# EAGLE board 20190105_ORIGAMI_V1-H-P (EAGLE 9.2.0)
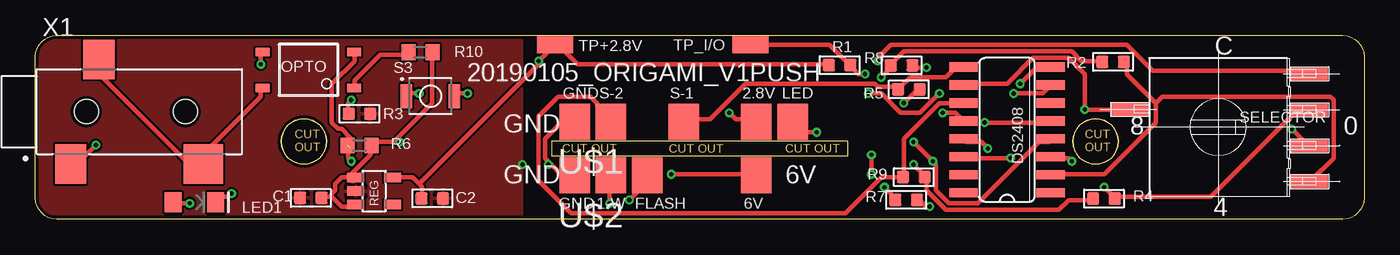
[diagram p0: board, top side]
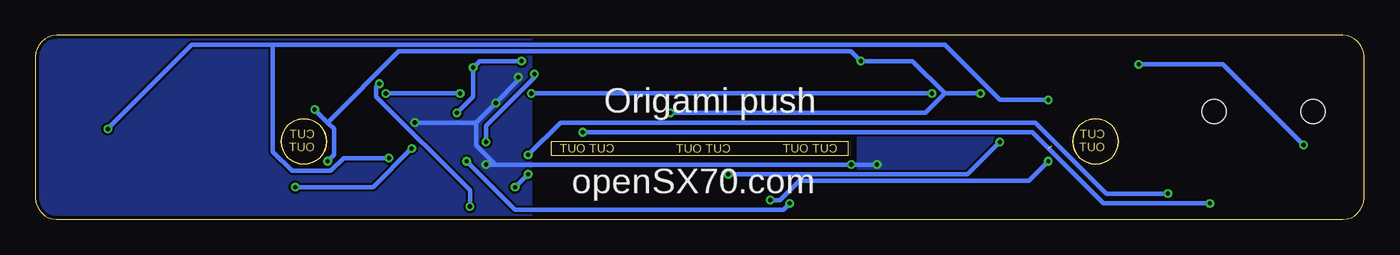
[diagram p1: board, bottom side, seen from below]

Size 94 x 13 mm. Coordinates in mm from the lower left corner, seen from the top.
Outline: 75,7.11 75.32,7.07 75.62,6.98 75.9,6.83 76.13,6.64 76.33,6.4 76.48,6.13 76.57,5.82 76.61,5.5
Outline: 76.61,5.5 76.57,5.18 76.48,4.88 76.33,4.6 76.13,4.37 75.9,4.17 75.62,4.02 75.32,3.93 75,3.9
Outline: 75,3.9 74.68,3.93 74.38,4.02 74.1,4.17 73.87,4.37
Outline: 73.87,4.37 73.67,4.6 73.52,4.88 73.43,5.18 73.4,5.5
Outline: 73.4,5.5 73.43,5.82 73.52,6.13 73.67,6.4 73.87,6.64
Outline: 73.87,6.64 74.1,6.83 74.38,6.98 74.68,7.07 75,7.11
Outline: 19,7.11 19.32,7.07 19.62,6.98 19.9,6.83 20.14,6.64
Outline: 20.14,6.64 20.33,6.4 20.48,6.13 20.57,5.82 20.61,5.5
Outline: 20.61,5.5 20.57,5.18 20.48,4.88 20.33,4.6 20.14,4.37
Outline: 20.14,4.37 19.9,4.17 19.62,4.02 19.32,3.93 19,3.9
Outline: 19,3.9 18.68,3.93 18.38,4.02 18.1,4.17 17.87,4.37
Outline: 17.87,4.37 17.67,4.6 17.52,4.88 17.43,5.18 17.4,5.5
Outline: 17.4,5.5 17.43,5.82 17.52,6.13 17.67,6.4 17.87,6.64
Outline: 17.87,6.64 18.1,6.83 18.38,6.98 18.68,7.07 19,7.11
Outline: 75,7.11 74.69,7.07 74.39,6.98 74.11,6.83 73.87,6.64
Outline: 73.87,6.64 73.67,6.39 73.52,6.11 73.43,5.81 73.4,5.5
Outline: 73.4,5.5 73.43,5.19 73.52,4.89 73.67,4.61 73.87,4.37
Outline: 73.87,4.37 74.11,4.17 74.39,4.02 74.69,3.93 75,3.9
Outline: 75,3.9 75.31,3.93 75.61,4.02 75.89,4.17 76.14,4.37 76.33,4.61 76.48,4.89 76.57,5.19 76.61,5.5
Outline: 76.61,5.5 76.57,5.81 76.48,6.11 76.33,6.39 76.14,6.64 75.89,6.83 75.61,6.98 75.31,7.07 75,7.11
Outline: 19,7.11 18.69,7.07 18.39,6.98 18.11,6.83 17.87,6.64
Outline: 17.87,6.64 17.67,6.39 17.52,6.11 17.43,5.81 17.4,5.5
Outline: 17.4,5.5 17.43,5.19 17.52,4.89 17.67,4.61 17.87,4.37
Outline: 17.87,4.37 18.11,4.17 18.39,4.02 18.69,3.93 19,3.9
Outline: 19,3.9 19.31,3.93 19.61,4.02 19.89,4.17 20.14,4.37
Outline: 20.14,4.37 20.33,4.61 20.48,4.89 20.57,5.19 20.61,5.5
Outline: 20.61,5.5 20.57,5.81 20.48,6.11 20.33,6.39 20.14,6.64
Outline: 20.14,6.64 19.89,6.83 19.61,6.98 19.31,7.07 19,7.11
Outline: 1.51,13 92.49,13 92.8,12.97 93.08,12.88 93.33,12.74 93.56,12.56 93.74,12.33 93.88,12.08 93.97,11.8 94,11.49 94,1.51 93.97,1.21 93.88,0.92 93.74,0.67 93.56,0.44 93.33,0.26 93.08,0.12 92.8,0.03 92.49,0 1.51,0 1.2,0.03 0.92,0.12 0.67,0.26 0.44,0.44 0.26,0.67 0.12,0.92 0.03,1.21 0,1.51 0,11.49 0.03,11.8 0.12,12.08 0.26,12.33 0.44,12.56 0.67,12.74 0.92,12.88 1.2,12.97 1.51,13
Outline: 36.5,4.5 57.5,4.5 57.5,5.5 36.5,5.5 36.5,4.5
Copper layers (1*16): Top 0.035mm / dielectric 1.5mm / Bottom 0.035mm
Design rules "SeeedStudio_2layer_DRU_no_angle_20140221": minimum track width 6mil, minimum drill 12mil, track to track 6mil, track to pad 6mil, pad to pad 6mil, via to via 6mil, smd to smd 0mil, copper to edge 10mil, drill to drill 10mil, minimum pad ring 10mil, minimum via ring 6mil, stop-mask expansion 2mil, vias tented up to drill 100mil, thermal gap 10mil
Net classes: 0 GND: width 0.305 mm; 1 VCC: width 0.254 mm; 2 2.8V: width 0.254 mm

## Footprints (pad centres in the part's own frame; a part is rotated, then mirrored left to right if it is on the bottom)
C0603 = smd 0.889 x 0.889: 1 0,0.762; 2 0,-0.762
SO16 = smd 0.66 x 2.032: 1 -4.445,-3.073; 2 -3.175,-3.073; 3 -1.905,-3.073; 4 -0.635,-3.073; 5 0.635,-3.073; 6 1.905,-3.073; 7 3.175,-3.073; 8 4.445,-3.073; 9 4.445,3.073; 10 3.175,3.073; 11 1.905,3.073; 12 0.635,3.073; 13 -0.635,3.073; 14 -1.905,3.073; 15 -3.175,3.073; 16 -4.445,3.073
LED-1206 = smd 1.2 x 1.4: A -1.5,0; C 1.5,0
SO-4 = smd 1 x 0.6: 1 -3.24,0.635; 2 -3.24,-1.905; 3 3.24,-1.905; 4 3.24,0.635
R0603 = smd 0.889 x 0.889: 1 0,0.762; 2 0,-0.762
R0603' = smd 1 x 1.1: 1 -0.85,0; 2 0.85,0
SOT-23-5 = smd 0.69 x 1.2: 1 -0.95,-1.3; 2 0,-1.3; 3 0.95,-1.3; 4 0.95,1.3; 5 -0.95,1.3
SW_B3U-1000P = smd 0.8 x 1.7: 1 -1.7,0; 2 1.7,0
A6RS-161RS = smd 1 x 2.7: 1 8.89,-1.397; 2 6.35,-1.397; 4 3.81,-1.397; 8 1.27,-1.397; C 6.35,11.303
SMD1,27-2,54 = smd 1.27 x 2.54: 1 0,0
FLASH-8-BRIDGE-SW1-SW2-LED = smd 2.159 x 2.54: GND -9,7.5; LED 6.42,7.5; SWITCH-1 -1.29,7.5; SWITCH-2 -6.43,7.5; VCC-2.8V 3.85,7.5
FLASH-8-BRIDGE1 = smd 2.159 x 2.54: FLASH-5 -3.86,7.5; GND -9,7.5; S2 -6.43,7.5; VCC-6V 3.85,7.5
CUI_SJ-3523-SMT-TR = smd 2.2 x 2.8: 1 -1.1,-3.7; 3 0.9,3.7 | smd 2.8 x 2.8: 2 8.3,-3.7 | hole 1.7: 0,0; 7,0

## Placement (x,y rotation side)
C1  1uf  [C0603]  19.48,1.51 270 top
C2  1uf  [C0603]  28.08,1.47 90 top
DS2408  DS2408  [SO16]  68.74,6.32 90 top
LED1  Yellow  [LED-1206]  11.25,1.21 0 top
OPTO  TLP127  [SO-4]  19.32,9.93 180 top
R1  4.7K  [R0603]  56.89,10.9 270 top
R2  100K  [R0603]  76.24,11.13 270 top
R3  100K  [R0603]  22.93,7.46 270 top
R4  100K  [R0603]  75.59,1.46 90 top
R5  100K  [R0603]  61.28,10.88 90 top
R6  18R  [R0603']  22.94,5.21 0 top
R7  100K  [R0603]  62.15,2.99 90 top
R8  100K  [R0603]  61.79,9.18 90 top
R9  220R  [R0603]  61.6,1.37 270 top
R10  18R  [R0603']  27.24,11.81 0 top
REG  NCP4688  [SOT-23-5]  23.97,2 270 top
S3  B3U-1000P  [SW_B3U-1000P]  27.94,8.71 0 top
SELECTOR  SELECTOR-4-1-SMD-A6RS  [A6RS-161RS]  88.69,1.39 90 top
TP+2.8V  [SMD1,27-2,54]  36.76,12.37 90 top
TP_I/O  [SMD1,27-2,54]  50.6,12.37 90 top
U$1  FLASH-BRIDGE-SW1-SW2-LED  [FLASH-8-BRIDGE-SW1-SW2-LED]  47.14,-0.59 0 top
U$2  FLASH-BRIDGE1  [FLASH-8-BRIDGE1]  47.14,-4.39 0 top
X1  JACK-SMD-SJ-3523-SMT-TR  [CUI_SJ-3523-SMT-TR]  3.6,7.61 0 top

## Library data of the parts
C1 C2 = Seeed-Capacitor; MPN: CC0603KRX7R8BB105
DS2408 = DS2408-joaco
LED1 = SparkFun-LED; PROD_ID: DIO-09909
OPTO REG = openSX70
R1 = Seeed-Resistor; MPN: RC0603JR-074K7L
R2-R5 R7 R8 = Seeed-Resistor; MPN: RC0603FR-07100KL
R6 R10 = resistor
R9 = Seeed-Resistor; MPN: RC0603JR-07220RL
S3 = Common-Parts-Library-Eagle; MANUFACTURER: Omron
SELECTOR U$1 U$2 = _openSX70
TP+2.8V TP_I/O = wirepad
X1 = _openSX70; AVAILABILITY: Unavailable; CUI_PURCHASE_URL: https://www.cui.com/product/interconnect/audio-connectors/3.5-mm-jacks/sj-352x-smt-series?utm_source=snapeda.com&utm_medium=referral&utm_campaign=snapedaBOM; DESCRIPTION: SJ Series 3.5 mm 12 V SMT Right Angle Stereo Audio Jack; MF: CUI Inc.; MP: SJ-3523-SMT-TR; PACKAGE: LGA-10 STMicroelectronics; PRICE: None

## Nets
1-WIRE: DS2408.4 R1.1 TP_I/O.1 U$2.S2
2.8V: C2.1 DS2408.3 DS2408.10 R1.2 REG.5 S3.1 SELECTOR.C TP+2.8V.1 U$1.VCC-2.8V
FLASH-5: OPTO.2 R6.1 U$2.FLASH-5
GND: C1.2 C2.2 DS2408.5 R2.2 R3.1 R4.1 R5.1 R7.2 R8.2 REG.2 U$1.GND U$2.GND
LED: LED1.A U$1.LED
N$1: OPTO.3 X1.1
N$2: LED1.C R9.2
N$3: DS2408.2 R2.1 SELECTOR.8
N$4: DS2408.14 R3.2 SELECTOR.4
N$5: DS2408.13 R4.2 SELECTOR.2
N$6: DS2408.7 S3.2
N$7: DS2408.8 R9.1
N$8: OPTO.1 R10.1
N$9: OPTO.4 X1.2 X1.3
N$13: DS2408.12 R5.2 SELECTOR.1
SWITCH-1: DS2408.9 R8.1 U$1.SWITCH-1
SWITCH-2: DS2408.11 R7.1 U$1.SWITCH-2
VCC-6V: C1.1 R6.2 R10.2 REG.1 REG.3 U$2.VCC-6V

## Tracks (layer width: path | path; a pad name or v marks a point on that pad's centre or on a via)
1-WIRE  (via drill 0.3)
  Top 0.305: TP_I/O.1 50.69,12.33 56.18,12.33 57.55,10.96 R1.1 57.78,10.73 58.23,10.27 v58.69,10.27 | v62.12,5.47 v63.49,4.1 63.72,3.87 63.72,2.04 64.64,1.13 66.69,1.13 71.04,5.47 71.72,5.47 DS2408.4 | v40.63,1.13 40.63,2.95 U$2.S2
  Bottom 0.305: v62.12,5.47 62.12,6.61 58.69,10.04 v58.69,10.27 | v40.63,1.13 41.09,0.67 60.06,0.67 v63.49,4.1
2.8V  (via drill 0.3)
  Top 0.305: v73.32,4.1 73.09,4.33 71.95,4.33 DS2408.3 | SELECTOR.C 77.21,7.76 v74.24,7.76 74.24,10.27 73.09,11.41 70.58,11.41 68.75,9.58 65.78,9.58 DS2408.10 | 27.15,2.5 26.69,2.95 25.32,2.95 REG.5 | 27.15,2.5 27.37,2.27 27.37,1.58 C2.1 | R1.2 55.95,10.96 38.35,10.96 36.97,12.33 TP+2.8V.1 36.75,12.33 v35.6,11.18 35.6,10.96 27.15,2.5 | v27.15,8.9 26.46,8.9 S3.1 | v49.09,7.53 49.55,7.07 50.92,7.07 U$1.VCC-2.8V
  Bottom 0.305: v73.32,4.1 72.87,4.55 72.87,6.38 73.32,6.84 | v74.24,7.76 73.32,6.84 | 29.66,8.9 v27.15,8.9 | 29.66,8.9 31.95,11.18 v35.6,11.18 36.29,11.87 68.29,11.87 73.32,6.84 | v49.09,7.53 31.03,7.53 29.66,8.9
FLASH-5  (via drill 0.3)  (1 unrouted)
  Top 0.305: OPTO.2 22.57,11.64 22.57,11.18 20.97,9.58 20.97,6.84 21.43,6.38 21.66,6.38 22.34,5.7 22.34,5.01 22.12,4.78 22.12,4.33 v22.34,4.1 | v42,1.35 43.15,2.5 43.15,2.95 U$2.FLASH-5
  Bottom 0.305: v42,1.35 41.32,1.35 39.95,2.73 23.72,2.73 v22.34,4.1
GND  (via drill 0.3)
  Top 0.305: R4.1 74.69,1.35 73.09,1.35 72.41,0.67 64.41,0.67 63.04,2.04 63.04,2.95 R7.2 62.81,3.18 v62.12,3.87 | 36.52,3.87 36.06,4.33 36.06,5.7 37.2,6.84 38.12,6.84 U$1.GND | 36.52,3.87 37.2,3.18 38.12,3.18 U$2.GND | 36.52,3.87 v36.29,3.87 | v61.44,8.21 62.35,9.13 R8.2 | v59.83,10.04 60.52,10.73 R5.1 60.52,10.96 61.44,11.87 73.32,11.87 74.01,11.18 75.38,11.18 R2.2 | v67.15,6.84 71.72,6.84 DS2408.5
  Bottom 0.305: v34.46,3.87 v36.29,3.87 61.44,3.87 | v59.83,10.04 59.83,9.81 v61.44,8.21 62.81,6.84 | v67.15,6.84 62.81,6.84 | 61.44,3.87 62.81,5.24 62.81,6.84 | v62.12,3.87 61.44,3.87
  pour Bottom: 0.14,12.81 33.94,12.81 35.84,10.91 35.84,-0.29 0.34,-0.29 0.24,-0.19 0.24,12.71
  pour Bottom: 58.94,12.91 58.94,0.01 94.24,0.01 94.34,0.11 94.34,13.21 59.24,13.21
  pour Top: 34.14,13.11 34.44,12.81 34.44,-0.09 1.34,-0.09 -0.06,1.31 0.34,13.11
LED  (via drill 0.3)
  Top 0.305: v10.91,1.13 9.77,1.13 LED1.A | v55.26,6.16 54.35,6.16 53.66,6.84 U$1.LED
  Bottom 0.305: v10.91,1.13 18.46,1.13 23.49,6.16 v55.26,6.16
N$1  (via drill 0.3)
  Top 0.305: v15.94,10.96 15.94,11.64 OPTO.3 | v4.29,5.24 3.14,4.1 2.68,4.1 X1.1
  Bottom 0.305: v15.94,10.96 10,10.96 v4.29,5.24
N$2  (via drill 0.3)
  Top 0.305: v60.06,2.27 60.75,1.58 R9.2 | v59.15,4.55 v59.15,3.18 | v13.89,1.81 13.66,1.58 12.97,1.58 12.74,1.35 LED1.C
  Bottom 0.305: v60.06,2.27 v59.15,3.18 | v59.15,4.55 56.86,6.84 23.26,6.84 18.23,1.81 v13.89,1.81
N$3
  Top 0.305: 79.27,8.21 77.21,10.27 77.21,10.96 R2.1 | 79.27,8.21 79.27,6.84 75.61,3.18 71.95,3.18 DS2408.2 | 79.27,8.21 79.72,8.67 91.61,8.67 91.84,8.44 91.84,4.33 90.24,2.73 SELECTOR.8
N$4  (via drill 0.3)
  Top 0.305: v22.34,8.44 22.12,8.21 22.12,7.53 R3.2 | v88.87,6.38 90.01,5.24 SELECTOR.4 | v68.98,4.33 65.78,4.33 DS2408.14
  Bottom 0.305: v22.34,8.44 25.77,8.44 29.66,12.33 77.21,12.33 | 77.21,12.33 82.92,12.33 v88.87,6.38 | v68.98,4.33 72.18,4.33 73.09,3.41 75.84,3.41 77.21,4.78 77.21,12.33
N$5  (via drill 0.3)
  Top 0.305: SELECTOR.2 90.01,7.53 89.1,7.53 83.15,1.58 76.52,1.58 R4.2 76.29,1.58 v75.61,2.27 | v67.38,5.01 66.92,5.47 65.78,5.47 DS2408.13
  Bottom 0.305: v67.38,5.01 70.12,2.27 v75.61,2.27
N$6  (via drill 0.3)
  Top 0.305: v30.57,8.9 29.66,8.9 S3.2 | v58.92,8.9 59.83,8.9 61.21,7.53 62.58,7.53 v63.95,8.9 | v69.21,8.9 71.26,8.9 71.72,9.36 DS2408.7
  Bottom 0.305: v58.92,8.9 v30.57,8.9 | v69.21,8.9 v63.95,8.9
N$7  (via drill 0.3)
  Top 0.305: v63.26,0.9 63.04,0.9 62.58,1.35 R9.1 | v69.66,9.58 70.81,10.73 71.72,10.73 DS2408.8
  Bottom 0.305: v63.26,0.9 63.26,2.04 69.89,8.67 69.89,9.36 v69.66,9.58
N$8
  Top 0.305: OPTO.1 22.57,9.36 22.57,9.81 24.4,11.64 26.23,11.64 R10.1
N$9
  Top 0.305: OPTO.4 15.94,9.13 15.94,8.67 12.06,4.78 12.06,4.1 X1.2 11.83,4.1 10.69,4.1 4.51,10.27 4.51,11.18 X1.3
N$13  (via drill 0.3)
  Top 0.305: v63.04,10.73 62.12,10.73 R5.2 | v64.18,7.53 65.09,7.53 65.55,7.07 DS2408.12 | v59.61,11.18 59.61,11.41 60.52,12.33 77.21,12.33 79.04,10.5 90.01,10.5 SELECTOR.1
  Bottom 0.305: v64.18,7.53 63.04,8.67 v63.04,10.73 62.58,11.18 v59.61,11.18
SWITCH-1
  Top 0.305: DS2408.9 65.55,10.73 65.09,10.73 64.41,10.04 61.89,10.04 61.21,9.36 R8.1 60.98,9.36 59.61,9.36 59.38,9.58 50.23,9.58 47.72,7.07 45.89,7.07 U$1.SWITCH-1
SWITCH-2
  Top 0.305: DS2408.11 65.55,8.21 63.95,8.21 61.44,5.7 61.44,3.18 R7.1 61.21,2.95 59.83,2.95 57.32,0.44 37.89,0.44 35.6,2.73 35.6,7.3 36.97,8.67 39.26,8.67 39.72,8.21 39.72,7.98 40.63,7.07 U$1.SWITCH-2
VCC-6V  (via drill 0.3)
  Top 0.305: 20.97,1.58 20.29,1.58 C1.1 | 20.97,1.58 21.66,0.9 22.57,0.9 REG.3 | 22.57,2.73 22.34,2.95 22.34,3.18 23.72,4.55 23.72,5.01 R6.2 23.72,5.24 23.94,5.47 25.32,5.47 25.54,5.7 | 25.54,5.7 28.06,8.21 28.06,11.64 R10.2 | 20.97,1.58 20.97,1.81 21.2,2.04 21.2,2.5 21.66,2.95 22.12,2.95 22.34,2.73 22.57,2.73 | REG.1 22.57,2.73 | v44.98,3.18 50.92,3.18 U$2.VCC-6V | v25.77,5.47 25.54,5.7
  Bottom 0.305: v44.98,3.18 28.06,3.18 v25.77,5.47

## Text on the board
Dimension: CUT / OUT | CUT OUT | CUT OUT | CUT OUT | CUT / OUT
tPlace: 20190105_ORIGAMI_V1PUSH
tNames: C | GND | S-2 | S-1 | 2.8V | LED | GND | 8 | 0 | GND | 6V | GND | 1-W | FLASH | 6V | 4
bNames: Origami push | openSX70.com